# EAGLE board Adapter-CMRI8-3dot5mm-adapter-array (EAGLE 7.7.0)
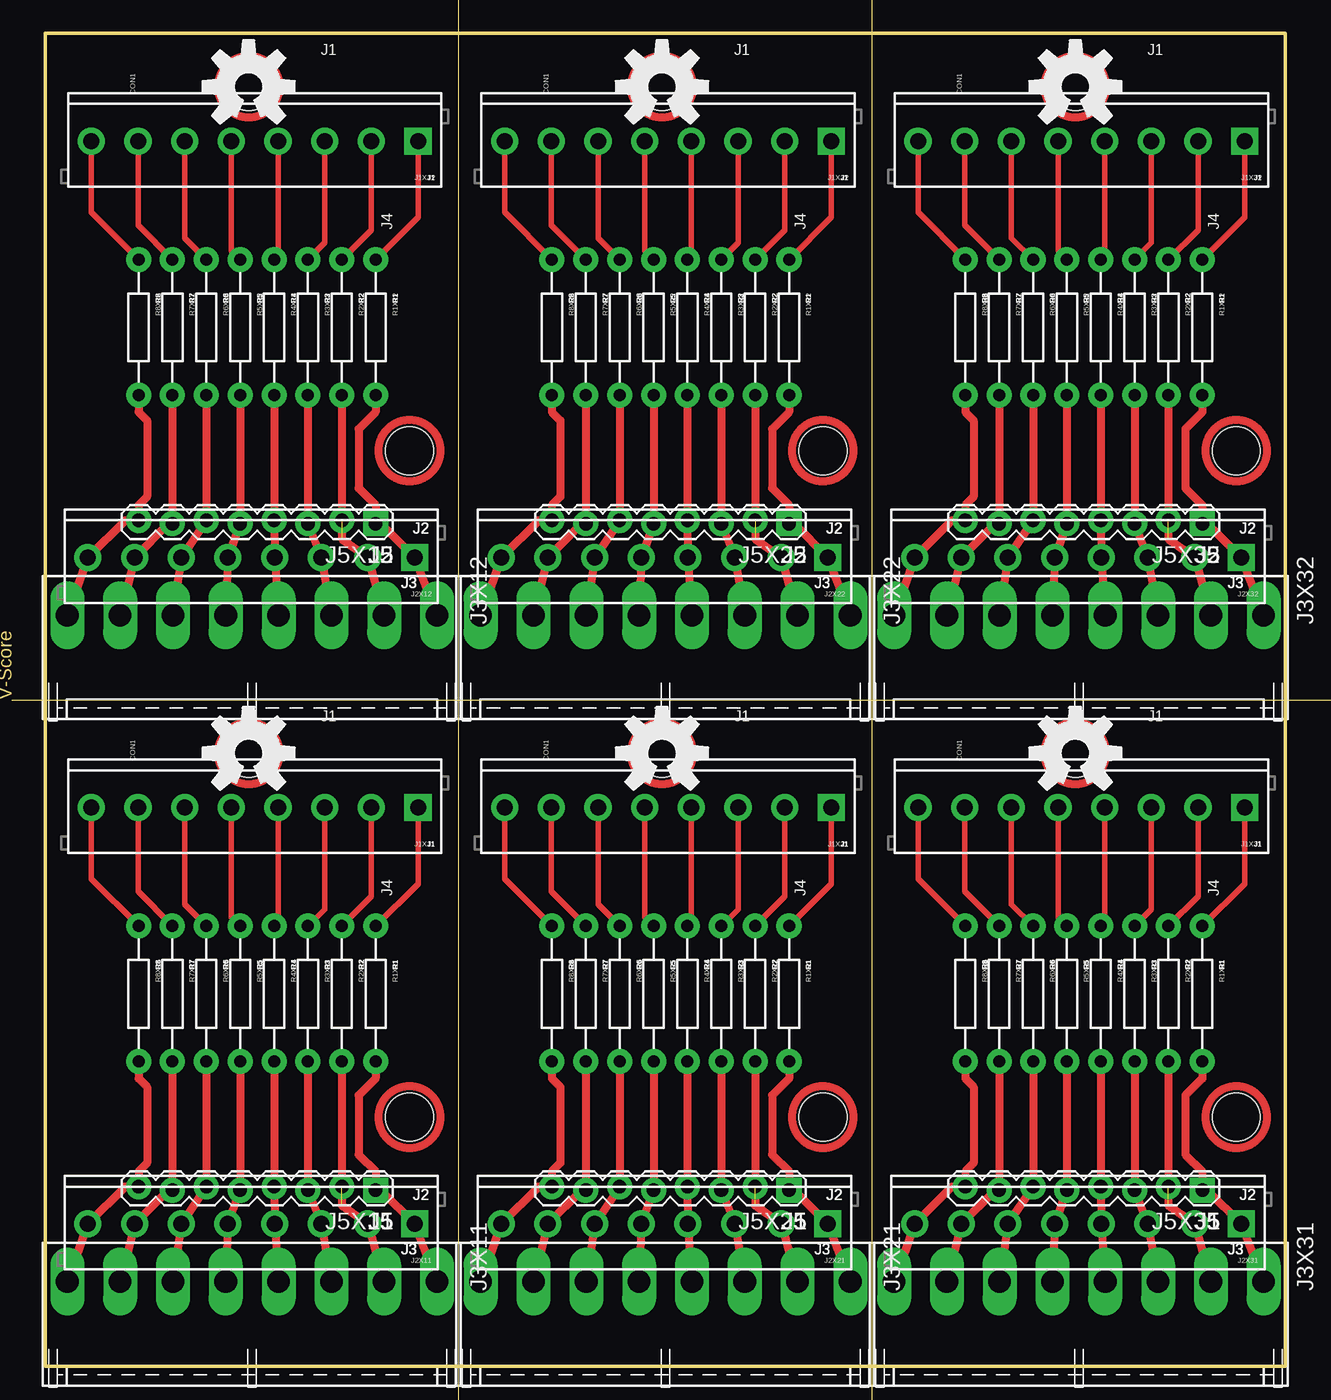
[diagram p0: board, top side]
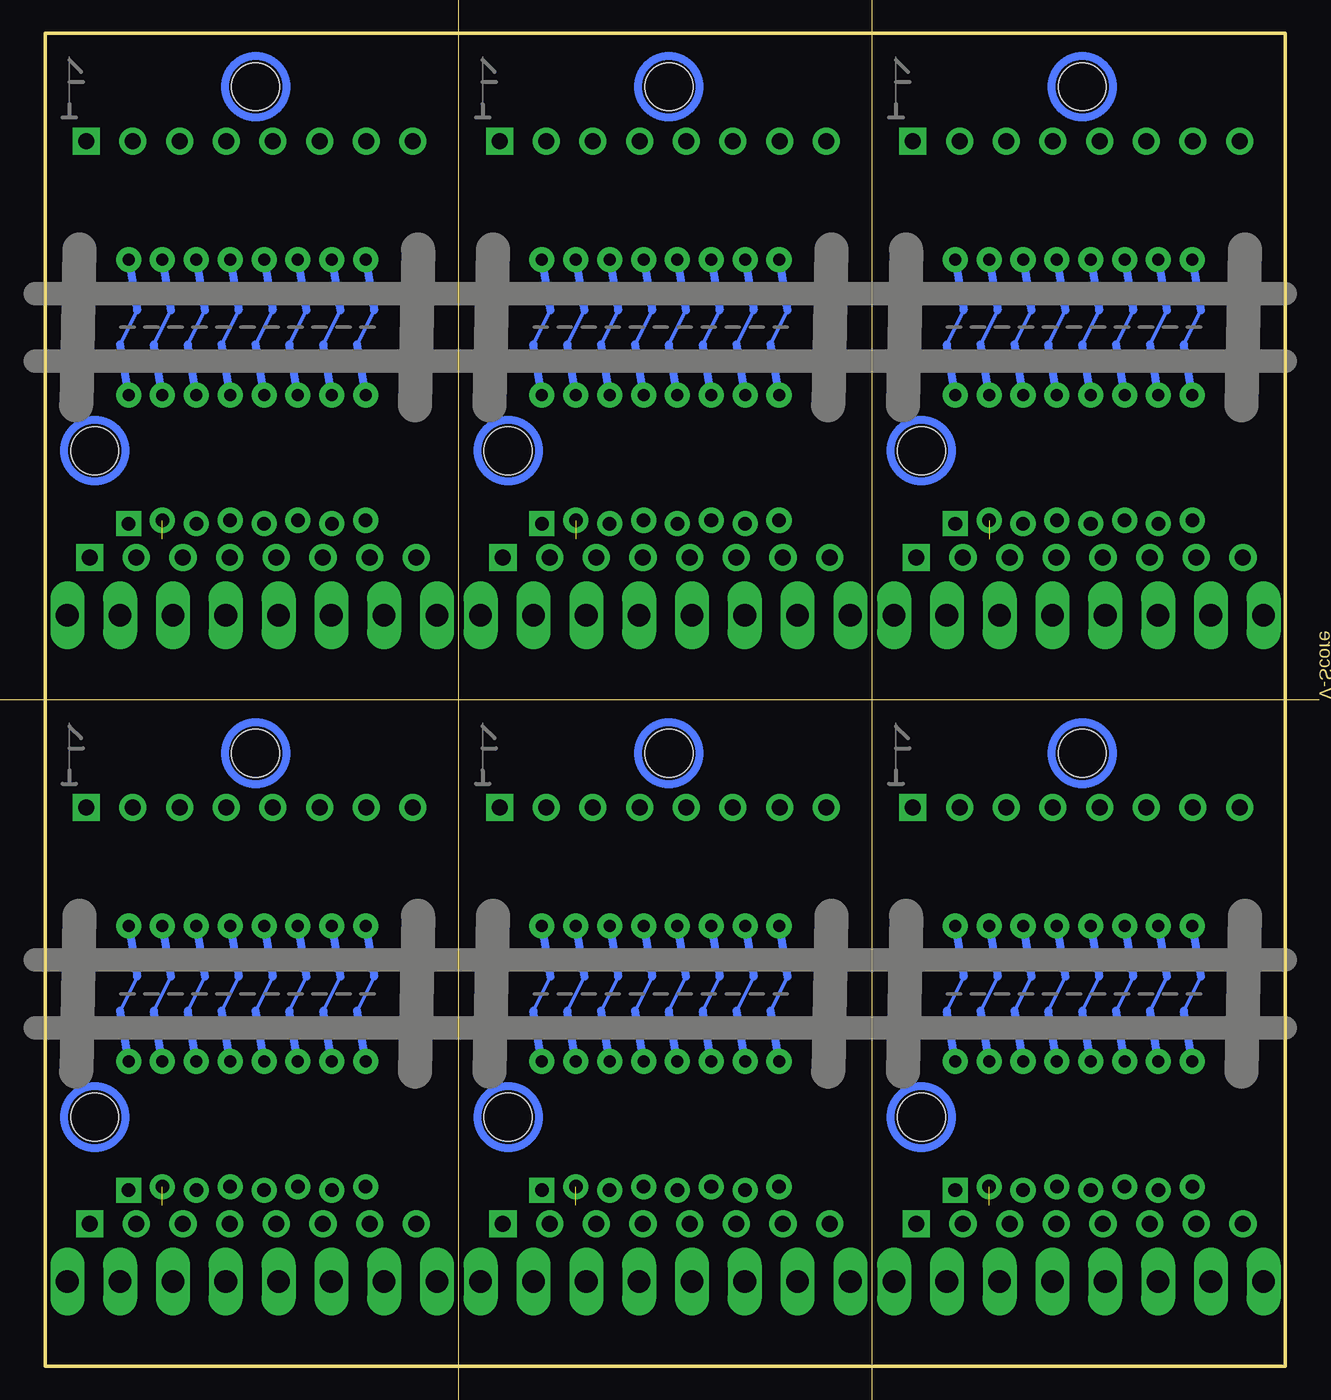
[diagram p1: board, bottom side, seen from below]

Size 93 x 100 mm. Coordinates in mm from the lower left corner, seen from the top.
Outline: 0,0 93,0 93,100 0,100 0,0
Copper layers (1*16): Top 0.035mm / dielectric 1.5mm / Bottom 0.035mm
Design rules "default": minimum track width 10mil, minimum drill 24mil, track to track 8mil, track to pad 8mil, pad to pad 8mil, via to via 8mil, smd to smd 8mil, copper to edge 40mil, drill to drill 8mil, minimum pad ring 10mil, minimum via ring 8mil, stop-mask expansion 4mil, vias tented up to drill 0mil, thermal gap 10mil
Milling: 3 lines

## Footprints (pad centres in the part's own frame; a part is rotated, then mirrored left to right if it is on the bottom)
SCREWTERMINAL-3.5MM-8 = drill 1.2 pad 2.032 square: 1 0,0 | drill 1.2 pad 2.032: 2 3.5,0; 3 7,0; 4 10.5,0; 5 14,0; 6 17.5,0; 7 21,0; 8 24.5,0
KK-156-8-F = drill 1.7 pad 2.184 long: 1 -13.86,0; 2 -9.9,0; 3 -5.94,0; 4 -1.98,0; 5 1.98,0; 6 5.94,0; 7 9.9,0; 8 13.86,0
1X08_LOCK = drill 1.016 pad 1.88 square: 1 0,0.127 | drill 1.016 pad 1.88: 2 2.54,-0.127; 3 5.08,0.127; 4 7.62,-0.127; 5 10.16,0.127; 6 12.7,-0.127; 7 15.24,0.127; 8 17.78,-0.127
MOUNTINGHOLE = hole 3.6: 0,0
AXIAL-0.4-RES = drill 0.9 pad 1.88: P$1 -5.08,0; P$2 5.08,0

## Placement (x,y rotation side)
J1X11  [SCREWTERMINAL-3.5MM-8]  27.94,41.91 180 top
J1X12  [SCREWTERMINAL-3.5MM-8]  27.94,91.91 180 top
J1X21  [SCREWTERMINAL-3.5MM-8]  58.94,41.91 180 top
J1X22  [SCREWTERMINAL-3.5MM-8]  58.94,91.91 180 top
J1X31  [SCREWTERMINAL-3.5MM-8]  89.94,41.91 180 top
J1X32  [SCREWTERMINAL-3.5MM-8]  89.94,91.91 180 top
J2X11  [SCREWTERMINAL-3.5MM-8]  27.69,10.67 180 top
J2X12  [SCREWTERMINAL-3.5MM-8]  27.69,60.67 180 top
J2X21  [SCREWTERMINAL-3.5MM-8]  58.69,10.67 180 top
J2X22  [SCREWTERMINAL-3.5MM-8]  58.69,60.67 180 top
J2X31  [SCREWTERMINAL-3.5MM-8]  89.69,10.67 180 top
J2X32  [SCREWTERMINAL-3.5MM-8]  89.69,60.67 180 top
J3X11  [KK-156-8-F]  15.5,6.35 180 top
J3X12  [KK-156-8-F]  15.5,56.35 180 top
J3X21  [KK-156-8-F]  46.5,6.35 180 top
J3X22  [KK-156-8-F]  46.5,56.35 180 top
J3X31  [KK-156-8-F]  77.5,6.35 180 top
J3X32  [KK-156-8-F]  77.5,56.35 180 top
J5X11  [1X08_LOCK]  24.77,13.34 180 top
J5X12  [1X08_LOCK]  24.77,63.34 180 top
J5X21  [1X08_LOCK]  55.77,13.34 180 top
J5X22  [1X08_LOCK]  55.77,63.34 180 top
J5X31  [1X08_LOCK]  86.77,13.34 180 top
J5X32  [1X08_LOCK]  86.77,63.34 180 top
M1X11  MOUNTINGHOLE  [MOUNTINGHOLE]  15.24,45.99 0 top
M1X12  MOUNTINGHOLE  [MOUNTINGHOLE]  15.24,95.99 0 top
M1X21  MOUNTINGHOLE  [MOUNTINGHOLE]  46.24,45.99 0 top
M1X22  MOUNTINGHOLE  [MOUNTINGHOLE]  46.24,95.99 0 top
M1X31  MOUNTINGHOLE  [MOUNTINGHOLE]  77.24,45.99 0 top
M1X32  MOUNTINGHOLE  [MOUNTINGHOLE]  77.24,95.99 0 top
M2X11  MOUNTINGHOLE  [MOUNTINGHOLE]  27.3,18.68 0 top
M2X12  MOUNTINGHOLE  [MOUNTINGHOLE]  27.3,68.69 0 top
M2X21  MOUNTINGHOLE  [MOUNTINGHOLE]  58.3,18.68 0 top
M2X22  MOUNTINGHOLE  [MOUNTINGHOLE]  58.3,68.69 0 top
M2X31  MOUNTINGHOLE  [MOUNTINGHOLE]  89.31,18.68 0 top
M2X32  MOUNTINGHOLE  [MOUNTINGHOLE]  89.31,68.69 0 top
R1X11  [AXIAL-0.4-RES]  24.77,27.94 270 top
R1X12  [AXIAL-0.4-RES]  24.77,77.94 270 top
R1X21  [AXIAL-0.4-RES]  55.77,27.94 270 top
R1X22  [AXIAL-0.4-RES]  55.77,77.94 270 top
R1X31  [AXIAL-0.4-RES]  86.77,27.94 270 top
R1X32  [AXIAL-0.4-RES]  86.77,77.94 270 top
R2X11  [AXIAL-0.4-RES]  22.23,27.94 270 top
R2X12  [AXIAL-0.4-RES]  22.23,77.94 270 top
R2X21  [AXIAL-0.4-RES]  53.23,27.94 270 top
R2X22  [AXIAL-0.4-RES]  53.23,77.94 270 top
R2X31  [AXIAL-0.4-RES]  84.22,27.94 270 top
R2X32  [AXIAL-0.4-RES]  84.22,77.94 270 top
R3X11  [AXIAL-0.4-RES]  19.68,27.94 270 top
R3X12  [AXIAL-0.4-RES]  19.68,77.94 270 top
R3X21  [AXIAL-0.4-RES]  50.69,27.94 270 top
R3X22  [AXIAL-0.4-RES]  50.69,77.94 270 top
R3X31  [AXIAL-0.4-RES]  81.69,27.94 270 top
R3X32  [AXIAL-0.4-RES]  81.69,77.94 270 top
R4X11  [AXIAL-0.4-RES]  17.14,27.94 270 top
R4X12  [AXIAL-0.4-RES]  17.14,77.94 270 top
R4X21  [AXIAL-0.4-RES]  48.15,27.94 270 top
R4X22  [AXIAL-0.4-RES]  48.15,77.94 270 top
R4X31  [AXIAL-0.4-RES]  79.14,27.94 270 top
R4X32  [AXIAL-0.4-RES]  79.14,77.94 270 top
R5X11  [AXIAL-0.4-RES]  14.61,27.94 270 top
R5X12  [AXIAL-0.4-RES]  14.61,77.94 270 top
R5X21  [AXIAL-0.4-RES]  45.6,27.94 270 top
R5X22  [AXIAL-0.4-RES]  45.6,77.94 270 top
R5X31  [AXIAL-0.4-RES]  76.61,27.94 270 top
R5X32  [AXIAL-0.4-RES]  76.61,77.94 270 top
R6X11  [AXIAL-0.4-RES]  12.06,27.94 270 top
R6X12  [AXIAL-0.4-RES]  12.06,77.94 270 top
R6X21  [AXIAL-0.4-RES]  43.06,27.94 270 top
R6X22  [AXIAL-0.4-RES]  43.06,77.94 270 top
R6X31  [AXIAL-0.4-RES]  74.06,27.94 270 top
R6X32  [AXIAL-0.4-RES]  74.06,77.94 270 top
R7X11  [AXIAL-0.4-RES]  9.53,27.94 270 top
R7X12  [AXIAL-0.4-RES]  9.53,77.94 270 top
R7X21  [AXIAL-0.4-RES]  40.52,27.94 270 top
R7X22  [AXIAL-0.4-RES]  40.52,77.94 270 top
R7X31  [AXIAL-0.4-RES]  71.53,27.94 270 top
R7X32  [AXIAL-0.4-RES]  71.53,77.94 270 top
R8X11  [AXIAL-0.4-RES]  6.99,27.94 270 top
R8X12  [AXIAL-0.4-RES]  6.99,77.94 270 top
R8X21  [AXIAL-0.4-RES]  37.98,27.94 270 top
R8X22  [AXIAL-0.4-RES]  37.98,77.94 270 top
R8X31  [AXIAL-0.4-RES]  68.98,27.94 270 top
R8X32  [AXIAL-0.4-RES]  68.98,77.94 270 top
U$1X11  DOC-OSHW-LOGO-L  [OSHW-LOGO-L]  15.24,45.99 0 top
U$1X12  DOC-OSHW-LOGO-L  [OSHW-LOGO-L]  15.24,95.99 0 top
U$1X21  DOC-OSHW-LOGO-L  [OSHW-LOGO-L]  46.24,45.99 0 top
U$1X22  DOC-OSHW-LOGO-L  [OSHW-LOGO-L]  46.24,95.99 0 top
U$1X31  DOC-OSHW-LOGO-L  [OSHW-LOGO-L]  77.24,45.99 0 top
U$1X32  DOC-OSHW-LOGO-L  [OSHW-LOGO-L]  77.24,95.99 0 top
U$2X11  [MRCSLOGOBTM]  22.86,43.18 0 top
U$2X12  [MRCSLOGOBTM]  22.86,93.18 0 top
U$2X21  [MRCSLOGOBTM]  53.86,43.18 0 top
U$2X22  [MRCSLOGOBTM]  53.86,93.18 0 top
U$2X31  [MRCSLOGOBTM]  84.86,43.18 0 top
U$2X32  [MRCSLOGOBTM]  84.86,93.18 0 top

## Library data of the parts
J1X11 J1X12 J1X21 J1X22 J1X31 J1X32 J2X11 J2X12 J2X21 J2X22 J2X31 J2X32 J3X11 J3X12 J3X21 J3X22 J3X31 J3X32 J5X11 J5X12 J5X21 J5X22 J5X31 J5X32 M1X11 M1X12 M1X21 M1X22 M1X31 M1X32 M2X11 M2X12 M2X21 M2X22 M2X31 M2X32 R1X11 R1X12 R1X21 R1X22 R1X31 R1X32 R2X11 R2X12 R2X21 R2X22 R2X31 R2X32 R3X11 R3X12 R3X21 R3X22 R3X31 R3X32 R4X11 R4X12 R4X21 R4X22 R4X31 R4X32 R5X11 R5X12 R5X21 R5X22 R5X31 R5X32 R6X11 R6X12 R6X21 R6X22 R6X31 R6X32 R7X11 R7X12 R7X21 R7X22 R7X31 R7X32 R8X11 R8X12 R8X21 R8X22 R8X31 R8X32 U$1X11 U$1X12 U$1X21 U$1X22 U$1X31 U$1X32 = SPCoast
U$2X11 U$2X12 U$2X21 U$2X22 U$2X31 U$2X32 = MRCSLogoBtm

## Nets
L1X11: J1X11.1 J2X11.1 J3X11.1 J5X11.1 R1X11.P$1 R1X11.P$2
L1X12: J1X12.1 J2X12.1 J3X12.1 J5X12.1 R1X12.P$1 R1X12.P$2
L1X21: J1X21.1 J2X21.1 J3X21.1 J5X21.1 R1X21.P$1 R1X21.P$2
L1X22: J1X22.1 J2X22.1 J3X22.1 J5X22.1 R1X22.P$1 R1X22.P$2
L1X31: J1X31.1 J2X31.1 J3X31.1 J5X31.1 R1X31.P$1 R1X31.P$2
L1X32: J1X32.1 J2X32.1 J3X32.1 J5X32.1 R1X32.P$1 R1X32.P$2
L2X11: J1X11.2 J2X11.2 J3X11.2 J5X11.2 R2X11.P$1 R2X11.P$2
L2X12: J1X12.2 J2X12.2 J3X12.2 J5X12.2 R2X12.P$1 R2X12.P$2
L2X21: J1X21.2 J2X21.2 J3X21.2 J5X21.2 R2X21.P$1 R2X21.P$2
L2X22: J1X22.2 J2X22.2 J3X22.2 J5X22.2 R2X22.P$1 R2X22.P$2
L2X31: J1X31.2 J2X31.2 J3X31.2 J5X31.2 R2X31.P$1 R2X31.P$2
L2X32: J1X32.2 J2X32.2 J3X32.2 J5X32.2 R2X32.P$1 R2X32.P$2
L3X11: J1X11.3 J2X11.3 J3X11.3 J5X11.3 R3X11.P$1 R3X11.P$2
L3X12: J1X12.3 J2X12.3 J3X12.3 J5X12.3 R3X12.P$1 R3X12.P$2
L3X21: J1X21.3 J2X21.3 J3X21.3 J5X21.3 R3X21.P$1 R3X21.P$2
L3X22: J1X22.3 J2X22.3 J3X22.3 J5X22.3 R3X22.P$1 R3X22.P$2
L3X31: J1X31.3 J2X31.3 J3X31.3 J5X31.3 R3X31.P$1 R3X31.P$2
L3X32: J1X32.3 J2X32.3 J3X32.3 J5X32.3 R3X32.P$1 R3X32.P$2
L4X11: J1X11.4 J2X11.4 J3X11.4 J5X11.4 R4X11.P$1 R4X11.P$2
L4X12: J1X12.4 J2X12.4 J3X12.4 J5X12.4 R4X12.P$1 R4X12.P$2
L4X21: J1X21.4 J2X21.4 J3X21.4 J5X21.4 R4X21.P$1 R4X21.P$2
L4X22: J1X22.4 J2X22.4 J3X22.4 J5X22.4 R4X22.P$1 R4X22.P$2
L4X31: J1X31.4 J2X31.4 J3X31.4 J5X31.4 R4X31.P$1 R4X31.P$2
L4X32: J1X32.4 J2X32.4 J3X32.4 J5X32.4 R4X32.P$1 R4X32.P$2
L5X11: J1X11.5 J2X11.5 J3X11.5 J5X11.5 R5X11.P$1 R5X11.P$2
L5X12: J1X12.5 J2X12.5 J3X12.5 J5X12.5 R5X12.P$1 R5X12.P$2
L5X21: J1X21.5 J2X21.5 J3X21.5 J5X21.5 R5X21.P$1 R5X21.P$2
L5X22: J1X22.5 J2X22.5 J3X22.5 J5X22.5 R5X22.P$1 R5X22.P$2
L5X31: J1X31.5 J2X31.5 J3X31.5 J5X31.5 R5X31.P$1 R5X31.P$2
L5X32: J1X32.5 J2X32.5 J3X32.5 J5X32.5 R5X32.P$1 R5X32.P$2
L6X11: J1X11.6 J2X11.6 J3X11.6 J5X11.6 R6X11.P$1 R6X11.P$2
L6X12: J1X12.6 J2X12.6 J3X12.6 J5X12.6 R6X12.P$1 R6X12.P$2
L6X21: J1X21.6 J2X21.6 J3X21.6 J5X21.6 R6X21.P$1 R6X21.P$2
L6X22: J1X22.6 J2X22.6 J3X22.6 J5X22.6 R6X22.P$1 R6X22.P$2
L6X31: J1X31.6 J2X31.6 J3X31.6 J5X31.6 R6X31.P$1 R6X31.P$2
L6X32: J1X32.6 J2X32.6 J3X32.6 J5X32.6 R6X32.P$1 R6X32.P$2
L7X11: J1X11.7 J2X11.7 J3X11.7 J5X11.7 R7X11.P$1 R7X11.P$2
L7X12: J1X12.7 J2X12.7 J3X12.7 J5X12.7 R7X12.P$1 R7X12.P$2
L7X21: J1X21.7 J2X21.7 J3X21.7 J5X21.7 R7X21.P$1 R7X21.P$2
L7X22: J1X22.7 J2X22.7 J3X22.7 J5X22.7 R7X22.P$1 R7X22.P$2
L7X31: J1X31.7 J2X31.7 J3X31.7 J5X31.7 R7X31.P$1 R7X31.P$2
L7X32: J1X32.7 J2X32.7 J3X32.7 J5X32.7 R7X32.P$1 R7X32.P$2
L8X11: J1X11.8 J2X11.8 J3X11.8 J5X11.8 R8X11.P$1 R8X11.P$2
L8X12: J1X12.8 J2X12.8 J3X12.8 J5X12.8 R8X12.P$1 R8X12.P$2
L8X21: J1X21.8 J2X21.8 J3X21.8 J5X21.8 R8X21.P$1 R8X21.P$2
L8X22: J1X22.8 J2X22.8 J3X22.8 J5X22.8 R8X22.P$1 R8X22.P$2
L8X31: J1X31.8 J2X31.8 J3X31.8 J5X31.8 R8X31.P$1 R8X31.P$2
L8X32: J1X32.8 J2X32.8 J3X32.8 J5X32.8 R8X32.P$1 R8X32.P$2

## Tracks (layer width: path | path; a pad name or v marks a point on that pad's centre or on a via)
L1X11
  Top 0.406: J1X11.1 27.94,36.2 R1X11.P$1
  Top 0.61: J3X11.1 J2X11.1 25.15,13.21 J5X11.1 24.77,14.61 23.5,15.88 23.5,20.32 24.77,21.59 R1X11.P$2
  Bottom 0.254: 24.13,29.21 25.4,26.67
  Bottom 0.61: R1X11.P$1 24.13,29.21 | R1X11.P$2 25.4,26.67
L1X12
  Top 0.406: J1X12.1 27.94,86.19 R1X12.P$1
  Top 0.61: J3X12.1 J2X12.1 25.15,63.21 J5X12.1 24.77,64.61 23.5,65.88 23.5,70.32 24.77,71.59 R1X12.P$2
  Bottom 0.254: 24.13,79.21 25.4,76.67
  Bottom 0.61: R1X12.P$1 24.13,79.21 | R1X12.P$2 25.4,76.67
L1X21
  Top 0.406: J1X21.1 58.94,36.2 R1X21.P$1
  Top 0.61: J3X21.1 J2X21.1 56.15,13.21 J5X21.1 55.77,14.61 54.49,15.88 54.49,20.32 55.77,21.59 R1X21.P$2
  Bottom 0.254: 55.13,29.21 56.4,26.67
  Bottom 0.61: R1X21.P$1 55.13,29.21 | R1X21.P$2 56.4,26.67
L1X22
  Top 0.406: J1X22.1 58.94,86.19 R1X22.P$1
  Top 0.61: J3X22.1 J2X22.1 56.15,63.21 J5X22.1 55.77,64.61 54.49,65.88 54.49,70.32 55.77,71.59 R1X22.P$2
  Bottom 0.254: 55.13,79.21 56.4,76.67
  Bottom 0.61: R1X22.P$1 55.13,79.21 | R1X22.P$2 56.4,76.67
L1X31
  Top 0.406: J1X31.1 89.94,36.2 R1X31.P$1
  Top 0.61: J3X31.1 J2X31.1 87.15,13.21 J5X31.1 86.77,14.61 85.5,15.88 85.5,20.32 86.77,21.59 R1X31.P$2
  Bottom 0.254: 86.13,29.21 87.4,26.67
  Bottom 0.61: R1X31.P$1 86.13,29.21 | R1X31.P$2 87.4,26.67
L1X32
  Top 0.406: J1X32.1 89.94,86.19 R1X32.P$1
  Top 0.61: J3X32.1 J2X32.1 87.15,63.21 J5X32.1 86.77,64.61 85.5,65.88 85.5,70.32 86.77,71.59 R1X32.P$2
  Bottom 0.254: 86.13,79.21 87.4,76.67
  Bottom 0.61: R1X32.P$1 86.13,79.21 | R1X32.P$2 87.4,76.67
L2X11  (1 unrouted)
  Top 0.406: J1X11.2 24.44,35.23 R2X11.P$1
  Top 0.61: J3X11.2 J2X11.2 22.23,12.06 R2X11.P$2
  Bottom 0.254: 21.59,29.21 22.86,26.67
  Bottom 0.61: R2X11.P$1 21.59,29.21 | R2X11.P$2 22.86,26.67
L2X12  (1 unrouted)
  Top 0.406: J1X12.2 24.44,85.23 R2X12.P$1
  Top 0.61: J3X12.2 J2X12.2 22.23,62.06 R2X12.P$2
  Bottom 0.254: 21.59,79.21 22.86,76.67
  Bottom 0.61: R2X12.P$1 21.59,79.21 | R2X12.P$2 22.86,76.67
L2X21  (1 unrouted)
  Top 0.406: J1X21.2 55.44,35.23 R2X21.P$1
  Top 0.61: J3X21.2 J2X21.2 53.23,12.06 R2X21.P$2
  Bottom 0.254: 52.59,29.21 53.86,26.67
  Bottom 0.61: R2X21.P$1 52.59,29.21 | R2X21.P$2 53.86,26.67
L2X22  (1 unrouted)
  Top 0.406: J1X22.2 55.44,85.23 R2X22.P$1
  Top 0.61: J3X22.2 J2X22.2 53.23,62.06 R2X22.P$2
  Bottom 0.254: 52.59,79.21 53.86,76.67
  Bottom 0.61: R2X22.P$1 52.59,79.21 | R2X22.P$2 53.86,76.67
L2X31  (1 unrouted)
  Top 0.406: J1X31.2 86.44,35.23 R2X31.P$1
  Top 0.61: J3X31.2 J2X31.2 84.22,12.06 R2X31.P$2
  Bottom 0.254: 83.59,29.21 84.86,26.67
  Bottom 0.61: R2X31.P$1 83.59,29.21 | R2X31.P$2 84.86,26.67
L2X32  (1 unrouted)
  Top 0.406: J1X32.2 86.44,85.23 R2X32.P$1
  Top 0.61: J3X32.2 J2X32.2 84.22,62.06 R2X32.P$2
  Bottom 0.254: 83.59,79.21 84.86,76.67
  Bottom 0.61: R2X32.P$1 83.59,79.21 | R2X32.P$2 84.86,76.67
L3X11
  Top 0.406: J1X11.3 20.94,34.27 R3X11.P$1
  Top 0.61: J3X11.3 J2X11.3 19.94,12.55 | J5X11.3 19.94,12.55 | R3X11.P$2 19.68,12.81 19.94,12.55
  Bottom 0.254: 19.05,29.21 20.32,26.67
  Bottom 0.61: R3X11.P$1 19.05,29.21 | R3X11.P$2 20.32,26.67
L3X12
  Top 0.406: J1X12.3 20.94,84.28 R3X12.P$1
  Top 0.61: J3X12.3 J2X12.3 19.94,62.55 | J5X12.3 19.94,62.55 | R3X12.P$2 19.68,62.81 19.94,62.55
  Bottom 0.254: 19.05,79.21 20.32,76.67
  Bottom 0.61: R3X12.P$1 19.05,79.21 | R3X12.P$2 20.32,76.67
L3X21
  Top 0.406: J1X21.3 51.94,34.27 R3X21.P$1
  Top 0.61: J3X21.3 J2X21.3 50.94,12.55 | J5X21.3 50.94,12.55 | R3X21.P$2 50.69,12.81 50.94,12.55
  Bottom 0.254: 50.05,29.21 51.32,26.67
  Bottom 0.61: R3X21.P$1 50.05,29.21 | R3X21.P$2 51.32,26.67
L3X22
  Top 0.406: J1X22.3 51.94,84.28 R3X22.P$1
  Top 0.61: J3X22.3 J2X22.3 50.94,62.55 | J5X22.3 50.94,62.55 | R3X22.P$2 50.69,62.81 50.94,62.55
  Bottom 0.254: 50.05,79.21 51.32,76.67
  Bottom 0.61: R3X22.P$1 50.05,79.21 | R3X22.P$2 51.32,76.67
L3X31
  Top 0.406: J1X31.3 82.94,34.27 R3X31.P$1
  Top 0.61: J3X31.3 J2X31.3 81.94,12.55 | J5X31.3 81.94,12.55 | R3X31.P$2 81.69,12.81 81.94,12.55
  Bottom 0.254: 81.05,29.21 82.32,26.67
  Bottom 0.61: R3X31.P$1 81.05,29.21 | R3X31.P$2 82.32,26.67
L3X32
  Top 0.406: J1X32.3 82.94,84.28 R3X32.P$1
  Top 0.61: J3X32.3 J2X32.3 81.94,62.55 | J5X32.3 81.94,62.55 | R3X32.P$2 81.69,62.81 81.94,62.55
  Bottom 0.254: 81.05,79.21 82.32,76.67
  Bottom 0.61: R3X32.P$1 81.05,79.21 | R3X32.P$2 82.32,76.67
L4X11
  Top 0.406: J1X11.4 17.44,33.31 R4X11.P$1
  Top 0.61: J3X11.4 J2X11.4 J5X11.4 R4X11.P$2
  Bottom 0.254: 16.51,29.21 17.78,26.67
  Bottom 0.61: R4X11.P$1 16.51,29.21 | R4X11.P$2 17.78,26.67
L4X12
  Top 0.406: J1X12.4 17.44,83.31 R4X12.P$1
  Top 0.61: J3X12.4 J2X12.4 J5X12.4 R4X12.P$2
  Bottom 0.254: 16.51,79.21 17.78,76.67
  Bottom 0.61: R4X12.P$1 16.51,79.21 | R4X12.P$2 17.78,76.67
L4X21
  Top 0.406: J1X21.4 48.44,33.31 R4X21.P$1
  Top 0.61: J3X21.4 J2X21.4 J5X21.4 R4X21.P$2
  Bottom 0.254: 47.51,29.21 48.78,26.67
  Bottom 0.61: R4X21.P$1 47.51,29.21 | R4X21.P$2 48.78,26.67
L4X22
  Top 0.406: J1X22.4 48.44,83.31 R4X22.P$1
  Top 0.61: J3X22.4 J2X22.4 J5X22.4 R4X22.P$2
  Bottom 0.254: 47.51,79.21 48.78,76.67
  Bottom 0.61: R4X22.P$1 47.51,79.21 | R4X22.P$2 48.78,76.67
L4X31
  Top 0.406: J1X31.4 79.44,33.31 R4X31.P$1
  Top 0.61: J3X31.4 J2X31.4 J5X31.4 R4X31.P$2
  Bottom 0.254: 78.51,29.21 79.78,26.67
  Bottom 0.61: R4X31.P$1 78.51,29.21 | R4X31.P$2 79.78,26.67
L4X32
  Top 0.406: J1X32.4 79.44,83.31 R4X32.P$1
  Top 0.61: J3X32.4 J2X32.4 J5X32.4 R4X32.P$2
  Bottom 0.254: 78.51,79.21 79.78,76.67
  Bottom 0.61: R4X32.P$1 78.51,79.21 | R4X32.P$2 79.78,76.67
L5X11
  Top 0.406: 14.87,33.28 R5X11.P$1 13.94,33.69 J1X11.5
  Top 0.61: J3X11.5 J2X11.5 J5X11.5 R5X11.P$2
  Bottom 0.254: 13.97,29.21 15.24,26.67
  Bottom 0.61: R5X11.P$1 13.97,29.21 | R5X11.P$2 15.24,26.67
L5X12
  Top 0.406: 14.87,83.28 R5X12.P$1 13.94,83.69 J1X12.5
  Top 0.61: J3X12.5 J2X12.5 J5X12.5 R5X12.P$2
  Bottom 0.254: 13.97,79.21 15.24,76.67
  Bottom 0.61: R5X12.P$1 13.97,79.21 | R5X12.P$2 15.24,76.67
L5X21
  Top 0.406: 45.87,33.28 R5X21.P$1 44.94,33.69 J1X21.5
  Top 0.61: J3X21.5 J2X21.5 J5X21.5 R5X21.P$2
  Bottom 0.254: 44.97,29.21 46.24,26.67
  Bottom 0.61: R5X21.P$1 44.97,29.21 | R5X21.P$2 46.24,26.67
L5X22
  Top 0.406: 45.87,83.28 R5X22.P$1 44.94,83.69 J1X22.5
  Top 0.61: J3X22.5 J2X22.5 J5X22.5 R5X22.P$2
  Bottom 0.254: 44.97,79.21 46.24,76.67
  Bottom 0.61: R5X22.P$1 44.97,79.21 | R5X22.P$2 46.24,76.67
L5X31
  Top 0.406: 76.86,33.28 R5X31.P$1 75.94,33.69 J1X31.5
  Top 0.61: J3X31.5 J2X31.5 J5X31.5 R5X31.P$2
  Bottom 0.254: 75.97,29.21 77.24,26.67
  Bottom 0.61: R5X31.P$1 75.97,29.21 | R5X31.P$2 77.24,26.67
L5X32
  Top 0.406: 76.86,83.28 R5X32.P$1 75.94,83.69 J1X32.5
  Top 0.61: J3X32.5 J2X32.5 J5X32.5 R5X32.P$2
  Bottom 0.254: 75.97,79.21 77.24,76.67
  Bottom 0.61: R5X32.P$1 75.97,79.21 | R5X32.P$2 77.24,76.67
L6X11
  Top 0.406: J1X11.6 10.44,34.65 R6X11.P$1
  Top 0.61: J3X11.6 J2X11.6 J5X11.6 R6X11.P$2
  Bottom 0.254: 11.43,29.21 12.7,26.67
  Bottom 0.61: R6X11.P$1 11.43,29.21 | R6X11.P$2 12.7,26.67
L6X12
  Top 0.406: J1X12.6 10.44,84.64 R6X12.P$1
  Top 0.61: J3X12.6 J2X12.6 J5X12.6 R6X12.P$2
  Bottom 0.254: 11.43,79.21 12.7,76.67
  Bottom 0.61: R6X12.P$1 11.43,79.21 | R6X12.P$2 12.7,76.67
L6X21
  Top 0.406: J1X21.6 41.44,34.65 R6X21.P$1
  Top 0.61: J3X21.6 J2X21.6 J5X21.6 R6X21.P$2
  Bottom 0.254: 42.43,29.21 43.7,26.67
  Bottom 0.61: R6X21.P$1 42.43,29.21 | R6X21.P$2 43.7,26.67
L6X22
  Top 0.406: J1X22.6 41.44,84.64 R6X22.P$1
  Top 0.61: J3X22.6 J2X22.6 J5X22.6 R6X22.P$2
  Bottom 0.254: 42.43,79.21 43.7,76.67
  Bottom 0.61: R6X22.P$1 42.43,79.21 | R6X22.P$2 43.7,76.67
L6X31
  Top 0.406: J1X31.6 72.44,34.65 R6X31.P$1
  Top 0.61: J3X31.6 J2X31.6 J5X31.6 R6X31.P$2
  Bottom 0.254: 73.43,29.21 74.7,26.67
  Bottom 0.61: R6X31.P$1 73.43,29.21 | R6X31.P$2 74.7,26.67
L6X32
  Top 0.406: J1X32.6 72.44,84.64 R6X32.P$1
  Top 0.61: J3X32.6 J2X32.6 J5X32.6 R6X32.P$2
  Bottom 0.254: 73.43,79.21 74.7,76.67
  Bottom 0.61: R6X32.P$1 73.43,79.21 | R6X32.P$2 74.7,76.67
L7X11
  Top 0.406: J1X11.7 6.94,35.6 R7X11.P$1
  Top 0.61: J3X11.7 J2X11.7 9.23,13.21 J5X11.7 R7X11.P$2
  Bottom 0.254: 8.89,29.21 10.16,26.67
  Bottom 0.61: R7X11.P$1 8.89,29.21 | R7X11.P$2 10.16,26.67
L7X12
  Top 0.406: J1X12.7 6.94,85.61 R7X12.P$1
  Top 0.61: J3X12.7 J2X12.7 9.23,63.21 J5X12.7 R7X12.P$2
  Bottom 0.254: 8.89,79.21 10.16,76.67
  Bottom 0.61: R7X12.P$1 8.89,79.21 | R7X12.P$2 10.16,76.67
L7X21
  Top 0.406: J1X21.7 37.94,35.6 R7X21.P$1
  Top 0.61: J3X21.7 J2X21.7 40.23,13.21 J5X21.7 R7X21.P$2
  Bottom 0.254: 39.89,29.21 41.16,26.67
  Bottom 0.61: R7X21.P$1 39.89,29.21 | R7X21.P$2 41.16,26.67
L7X22
  Top 0.406: J1X22.7 37.94,85.61 R7X22.P$1
  Top 0.61: J3X22.7 J2X22.7 40.23,63.21 J5X22.7 R7X22.P$2
  Bottom 0.254: 39.89,79.21 41.16,76.67
  Bottom 0.61: R7X22.P$1 39.89,79.21 | R7X22.P$2 41.16,76.67
L7X31
  Top 0.406: J1X31.7 68.94,35.6 R7X31.P$1
  Top 0.61: J3X31.7 J2X31.7 71.23,13.21 J5X31.7 R7X31.P$2
  Bottom 0.254: 70.89,29.21 72.16,26.67
  Bottom 0.61: R7X31.P$1 70.89,29.21 | R7X31.P$2 72.16,26.67
L7X32
  Top 0.406: J1X32.7 68.94,85.61 R7X32.P$1
  Top 0.61: J3X32.7 J2X32.7 71.23,63.21 J5X32.7 R7X32.P$2
  Bottom 0.254: 70.89,79.21 72.16,76.67
  Bottom 0.61: R7X32.P$1 70.89,79.21 | R7X32.P$2 72.16,76.67
L8X11
  Top 0.406: J1X11.8 3.44,36.56 R8X11.P$1
  Top 0.61: J3X11.8 J2X11.8 5.98,13.46 J5X11.8 6.99,14.61 7.62,15.24 7.62,20.95 6.99,21.59 R8X11.P$2
  Bottom 0.254: 6.35,29.21 7.62,26.67
  Bottom 0.61: R8X11.P$1 6.35,29.21 | R8X11.P$2 7.62,26.67
L8X12
  Top 0.406: J1X12.8 3.44,86.56 R8X12.P$1
  Top 0.61: J3X12.8 J2X12.8 5.98,63.46 J5X12.8 6.99,64.61 7.62,65.24 7.62,70.95 6.99,71.59 R8X12.P$2
  Bottom 0.254: 6.35,79.21 7.62,76.67
  Bottom 0.61: R8X12.P$1 6.35,79.21 | R8X12.P$2 7.62,76.67
L8X21
  Top 0.406: J1X21.8 34.44,36.56 R8X21.P$1
  Top 0.61: J3X21.8 J2X21.8 36.98,13.46 J5X21.8 37.98,14.61 38.62,15.24 38.62,20.95 37.98,21.59 R8X21.P$2
  Bottom 0.254: 37.35,29.21 38.62,26.67
  Bottom 0.61: R8X21.P$1 37.35,29.21 | R8X21.P$2 38.62,26.67
L8X22
  Top 0.406: J1X22.8 34.44,86.56 R8X22.P$1
  Top 0.61: J3X22.8 J2X22.8 36.98,63.46 J5X22.8 37.98,64.61 38.62,65.24 38.62,70.95 37.98,71.59 R8X22.P$2
  Bottom 0.254: 37.35,79.21 38.62,76.67
  Bottom 0.61: R8X22.P$1 37.35,79.21 | R8X22.P$2 38.62,76.67
L8X31
  Top 0.406: J1X31.8 65.44,36.56 R8X31.P$1
  Top 0.61: J3X31.8 J2X31.8 67.98,13.46 J5X31.8 68.98,14.61 69.62,15.24 69.62,20.95 68.98,21.59 R8X31.P$2
  Bottom 0.254: 68.35,29.21 69.62,26.67
  Bottom 0.61: R8X31.P$1 68.35,29.21 | R8X31.P$2 69.62,26.67
L8X32
  Top 0.406: J1X32.8 65.44,86.56 R8X32.P$1
  Top 0.61: J3X32.8 J2X32.8 67.98,63.46 J5X32.8 68.98,64.61 69.62,65.24 69.62,70.95 68.98,71.59 R8X32.P$2
  Bottom 0.254: 68.35,79.21 69.62,76.67
  Bottom 0.61: R8X32.P$1 68.35,79.21 | R8X32.P$2 69.62,76.67

## Text on the board
tPlace: J1 | J1 | J1 | R8 | R7 | R6 | R5 | R4 | R3 | R2 | R1 | R8 | R7 | R6 | R5 | R4 | R3 | R2 | R1 | R8 | R7 | R6 | R5 | R4 | R3 | R2 | R1 | J5 | J5 | J5 | J1 | J1 | J1 | R8 | R7 | R6 | R5 | R4 | R3 | R2 | R1 | R8 | R7 | R6 | R5 | R4 | R3 | R2 | R1 | R8 | R7 | R6 | R5 | R4 | R3 | R2 | R1 | J5 | J5 | J5
Milling: V-Score | V-Score | V-Score
tDocu: COMMON | COMMON | COMMON | Cut on / reverse for / Resistors | 3.5mm | Breakout | Cut on / reverse for / Resistors | 3.5mm | Breakout | Cut on / reverse for / Resistors | 3.5mm | Breakout | 8 | 1 | 8 | 1 | 8 | 1 | 2021.02 | 2021.02 | 2021.02 | v1.0 | v1.0 | v1.0 | 0.100 | 0.100 | 0.100 | 3.5mm | 3.5mm | 3.5mm | 8 | 1 | 8 | 1 | 8 | 1 | 0.156 | 0.156 | 0.156 | COMMON | COMMON | COMMON | Cut on / reverse for / Resistors | 3.5mm | Breakout | Cut on / reverse for / Resistors | 3.5mm | Breakout | Cut on / reverse for / Resistors | 3.5mm | Breakout | 8 | 1 | 8 | 1 | 8 | 1 | 2021.02 | 2021.02 | 2021.02 | v1.0 | v1.0 | v1.0 | 0.100 | 0.100 | 0.100 | 3.5mm | 3.5mm | 3.5mm | 8 | 1 | 8 | 1 | 8 | 1 | 0.156 | 0.156 | 0.156
bDocu: Solder / Side | Solder / Side | Solder / Side | CMRI Accessory | CMRI Accessory | CMRI Accessory | 8 pin Molex to 3.5mm | 8 pin Molex to 3.5mm | 8 pin Molex to 3.5mm | Seth Neumann / John Plocher | Seth Neumann / John Plocher | Seth Neumann / John Plocher | Model Railroading is fun! | Model Railroading is fun! | Model Railroading is fun! | Made in the PCR, Coast Division, NMRA | Made in the PCR, Coast Division, NMRA | Made in the PCR, Coast Division, NMRA | Solder / Side | Solder / Side | Solder / Side | CMRI Accessory | CMRI Accessory | CMRI Accessory | 8 pin Molex to 3.5mm | 8 pin Molex to 3.5mm | 8 pin Molex to 3.5mm | Seth Neumann / John Plocher | Seth Neumann / John Plocher | Seth Neumann / John Plocher | Model Railroading is fun! | Model Railroading is fun! | Model Railroading is fun! | Made in the PCR, Coast Division, NMRA | Made in the PCR, Coast Division, NMRA | Made in the PCR, Coast Division, NMRA
_tNames: J1 | J1 | J1 | CON1 | CON1 | CON1 | J1 | J1 | J1 | J1 | J1 | J1 | J1 | J1 | J1 | J1 | J1 | J1 | J4 | J4 | J4 | R8 | R8 | R8 | R8 | R8 | R7 | R7 | R7 | R7 | R7 | R6 | R6 | R6 | R6 | R6 | R5 | R5 | R5 | R5 | R5 | R4 | R4 | R4 | R4 | R4 | R3 | R3 | R3 | R3 | R3 | R2 | R2 | R2 | R2 | R2 | R1 | R1 | R1 | R1 | R1 | R8 | R8 | R8 | R8 | R8 | R7 | R7 | R7 | R7 | R7 | R6 | R6 | R6 | R6 | R6 | R5 | R5 | R5 | R5 | R5 | R4 | R4 | R4 | R4 | R4 | R3 | R3 | R3 | R3 | R3 | R2 | R2 | R2 | R2 | R2 | R1 | R1 | R1 | R1 | R1 | R8 | R8 | R8 | R8 | R8 | R7 | R7 | R7 | R7 | R7 | R6 | R6 | R6 | R6 | R6 | R5 | R5 | R5 | R5 | R5 | R4 | R4 | R4 | R4 | R4 | R3 | R3 | R3 | R3 | R3 | R2 | R2 | R2 | R2 | R2 | R1 | R1 | R1 | R1 | R1 | J5 | J5 | J5 | J5 | J5 | J2 | J2 | J2 | J2 | J2 | J5 | J5 | J5 | J5 | J5 | J2 | J2 | J2 | J2 | J2 | J5 | J5 | J5 | J5 | J5 | J2 | J2 | J2 | J2 | J2 | J3 | J3 | J3 | J3 | J3 | J3 | J3 | J3 | J3 | J3 | J3 | J3 | J3 | J3 | J3 | J1 | J1 | J1 | CON1 | CON1 | CON1 | J1 | J1 | J1 | J1 | J1 | J1 | J1 | J1 | J1 | J1 | J1 | J1 | J4 | J4 | J4 | R8 | R8 | R8 | R8 | R8 | R7 | R7 | R7 | R7 | R7 | R6 | R6 | R6 | R6 | R6 | R5 | R5 | R5 | R5 | R5 | R4 | R4 | R4 | R4 | R4 | R3 | R3 | R3 | R3 | R3 | R2 | R2 | R2 | R2 | R2 | R1 | R1 | R1 | R1 | R1 | R8 | R8 | R8 | R8 | R8 | R7 | R7 | R7 | R7 | R7 | R6 | R6 | R6 | R6 | R6 | R5 | R5 | R5 | R5 | R5 | R4 | R4 | R4 | R4 | R4 | R3 | R3 | R3 | R3 | R3 | R2 | R2 | R2 | R2 | R2 | R1 | R1 | R1 | R1 | R1 | R8 | R8 | R8 | R8 | R8 | R7 | R7 | R7 | R7 | R7 | R6 | R6 | R6 | R6 | R6 | R5 | R5 | R5 | R5 | R5 | R4 | R4 | R4 | R4 | R4 | R3 | R3 | R3 | R3 | R3 | R2 | R2 | R2 | R2 | R2 | R1 | R1 | R1 | R1 | R1 | J5 | J5 | J5 | J5 | J5 | J2 | J2 | J2 | J2 | J2 | J5 | J5 | J5 | J5 | J5 | J2 | J2 | J2 | J2 | J2 | J5 | J5 | J5 | J5 | J5 | J2 | J2 | J2 | J2 | J2 | J3 | J3 | J3 | J3 | J3 | J3 | J3 | J3 | J3 | J3 | J3 | J3 | J3 | J3 | J3